# Altium PCB PCB1.PcbDoc (part 2 of 2)
Units mm, origin at the board's own origin, x right, y up, seen from the top; angles counter-clockwise.
Board outline 24 x 26.9 mm, 6 copper layers (Top Layer, Int1 (GND), Int2 (PWR), Int3 (Sign), Int4 (GND), Bottom Layer), stack 1.538 mm thick; 87 components, 95 nets, 449 pads, 224 vias.
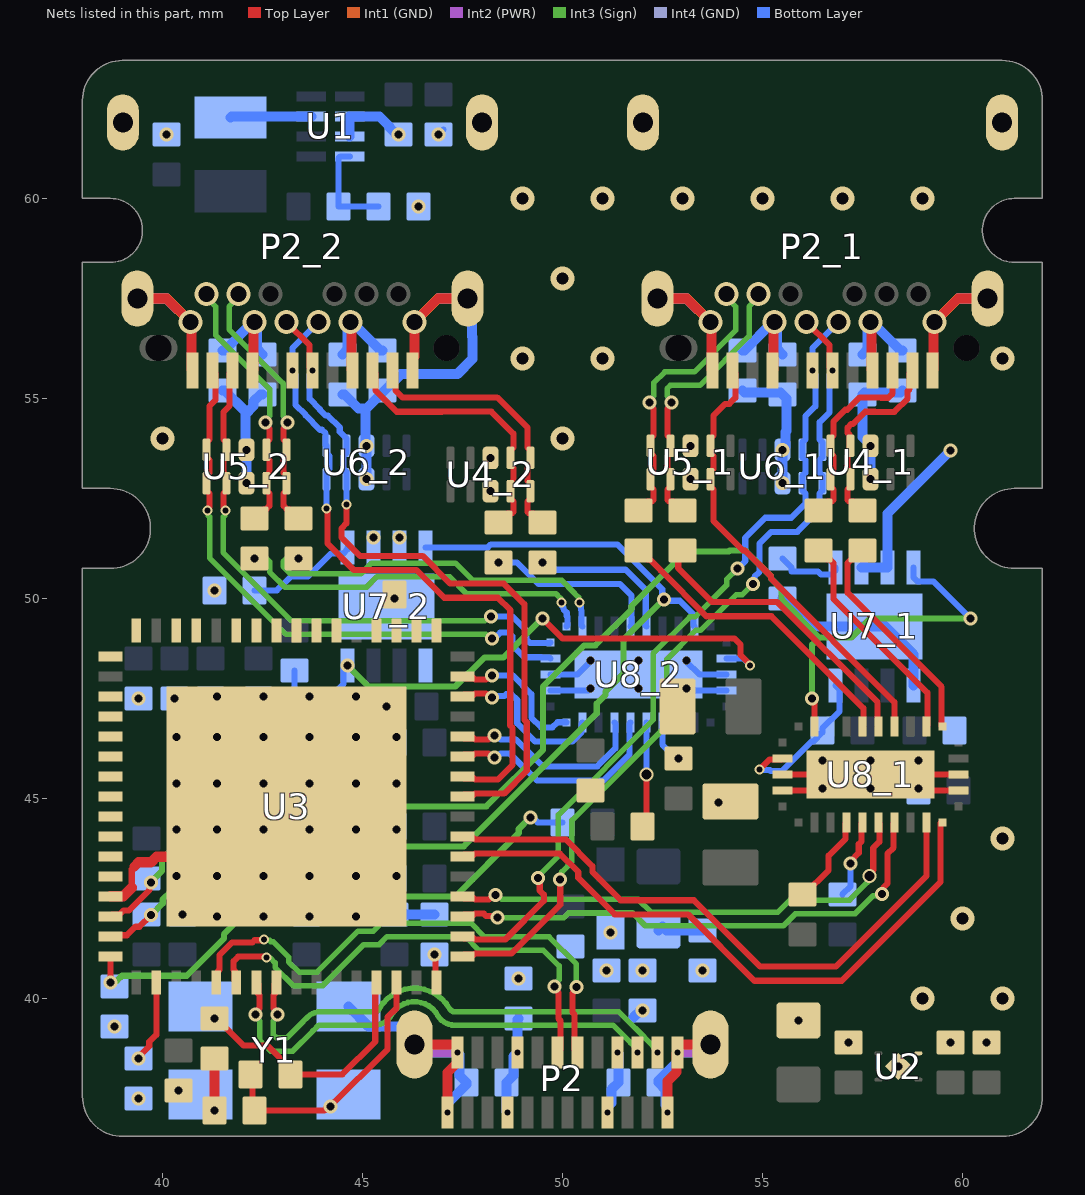
[diagram p6: the nets of this part, all layers, seen from the top]

## Via types
v1: diameter 0.35, hole 0.2, Top Layer to Bottom Layer, 129 vias
v2: diameter 0.2, hole 0.2, Top Layer to Bottom Layer, 44 vias
v3: diameter 0.25, hole 0.15, Top Layer to Bottom Layer, 33 vias
v4: diameter 0.6, hole 0.3, Top Layer to Bottom Layer, 16 vias
v5: diameter 0.35, hole 0.25, Top Layer to Bottom Layer, 2 vias

## Nets (pads, with @x,y where several pads share a name; then routed paths per layer and width w, separated by ;. In a path a pad name is that pad's centre, name@x,y a point inside that pad or via, vN(x,y) a via of type N, cw(c..) or ccw(c..) an arc to the next point about the centre after c; other vN are vias at no path point) (continued)
CRX2_1_P: P2_1.A11 U5_1.2 U5_1.9 U8_1.19 | length 11.2
  Top Layer w0.155: U5_1.2@53.7,53.817 53.7,53.635 53.773,53.562 53.773,53.238 53.7,53.165 U5_1.9@53.7,52.983 53.7,52.8 53.773,52.727 53.773,51.938 54.51,51.2 54.563,51.2 55.214,50.549 55.214,50.496 58.3,47.41 U8_1.19@58.3,46.8 ; U5_1.2@53.7,53.9 53.7,54 53.773,54.073 53.773,54.566 54.071,54.865 54.169,54.865 54.323,55.018 54.323,55.627 P2_1.A11@54.25,55.7
CRX2_2_N: P2_2.A10 U5_2.4 U5_2.7 U8_2.15 | length 14.1
  Top Layer w0.155: v3(41.575,52.2) 41.575,52.226 41.527,52.273 41.527,52.627 41.6,52.7 U5_2.7@41.6,52.883 41.6,53.065 41.527,53.138 41.527,53.462 41.6,53.535 U5_2.4@41.6,53.717 41.6,53.9 41.527,53.973 41.527,54.664 41.677,54.814 41.677,55.627 P2_2.A10@41.75,55.7
  Int3 (Sign) w0.138: v3(41.575,52.2) 41.554,52.179 41.554,52.071 41.519,52.037 41.519,51.153 43.231,49.441 48.056,49.441 48.162,49.547 v1(48.219,49.547)
  Bottom Layer w0.155: v1(48.219,49.547) 48.754,49.547 49.1,49.202 49.1,48.979 49.196,48.883 49.683,48.883 U8_2.15@49.7,48.9
CRX2_2_P: P2_2.A11 U5_2.5 U5_2.6 U8_2.14 | length 14.8
  Top Layer w0.155: v3(41.125,52.2) 41.125,52.226 41.173,52.273 41.173,52.627 41.1,52.7 U5_2.6@41.1,52.883 41.1,53.065 41.173,53.138 41.173,53.462 41.1,53.535 U5_2.5@41.1,53.717 41.1,53.9 41.173,53.973 41.173,54.811 41.323,54.961 41.323,55.627 P2_2.A11@41.25,55.7
  Int3 (Sign) w0.138: v3(41.125,52.2) 41.146,52.179 41.146,52.071 41.181,52.037 41.181,51.013 43.091,49.103 48.078,49.103 48.183,48.998 v1(48.241,48.998)
  Bottom Layer w0.155: v1(48.241,48.998) 48.294,48.998 48.441,49.145 48.654,49.145 48.745,49.055 48.745,48.832 49.049,48.528 49.476,48.528 49.482,48.523 49.677,48.523 U8_2.14@49.7,48.5
CTX1_1_N: C36_1.2 P2_1.A3 U4_1.5 U4_1.6 | length 4.9
  Top Layer w0.155: C36_1.2@56.4,52.2 56.623,52.423 56.727,52.423 56.773,52.468 56.773,52.727 56.7,52.8 U4_1.6@56.7,52.983 56.7,53.165 56.773,53.238 56.773,53.562 56.7,53.635 56.7,54 56.773,54.073 56.773,54.42 57.071,54.718 57.12,54.718 57.425,55.023 57.961,55.023 57.966,55.018 58.147,55.018 58.253,55.124 58.253,55.697 P2_1.A3@58.25,55.7
CTX1_1_P: C35_1.2 P2_1.A2 U4_1.4 U4_1.7 | length 5
  Top Layer w0.155: C35_1.2@57.5,52.2 57.277,52.423 57.173,52.423 57.127,52.468 57.127,52.727 57.2,52.8 U4_1.7@57.2,52.983 57.2,53.165 57.127,53.238 57.127,53.562 57.2,53.635 57.177,53.658 57.177,54.095 57.127,54.145 57.127,54.273 57.218,54.363 57.267,54.363 57.572,54.668 57.814,54.668 57.819,54.663 58.294,54.663 58.627,54.997 58.627,55.187 58.677,55.237 58.677,55.627 P2_1.A2@58.75,55.7
CTX1_2_N: C36_2.2 P2_2.A3 U4_2.2 U4_2.9 | length 7
  Top Layer w0.155: P2_2.A3@45.25,55.7 45.323,55.627 45.323,55.204 45.859,54.668 46.99,54.668 46.995,54.673 48.219,54.673 48.773,54.12 48.773,53.773 48.7,53.7 U4_2.2@48.7,53.518 48.7,53.335 48.773,53.262 48.773,52.938 48.7,52.865 U4_2.9@48.7,52.683 48.7,52.5 48.773,52.427 48.773,52.168 48.727,52.123 48.623,52.123 C36_2.2@48.4,51.9
CTX1_2_P: C35_2.2 P2_2.A2 U4_2.1 U4_2.10 | length 6.9
  Top Layer w0.155: P2_2.A2@45.75,55.7 45.823,55.627 45.823,55.206 46.006,55.023 46.844,55.023 46.848,55.027 48.366,55.027 49.127,54.266 49.127,53.773 49.2,53.7 U4_2.1@49.2,53.518 49.2,53.335 49.127,53.262 49.127,52.938 49.2,52.865 U4_2.10@49.2,52.683 49.2,52.5 49.127,52.427 49.127,52.168 49.173,52.123 49.277,52.123 C35_2.2@49.5,51.9
CTX1_N: P2.A3 U3.55 | length 12.1
  Top Layer w0.155: v1(42.325,39.6) 42.325,39.653 42.423,39.751 42.423,40.087 42.392,40.117 42.392,40.357 U3.55@42.35,40.4
  Int3 (Sign) w0.138: v1(42.325,39.6) 42.325,39.543 42.431,39.437 42.431,38.959 42.71,38.68 43.252,38.68 43.763,39.192 43.862,39.291 cw(c43.96,39.193) 43.96,39.331 45.302,39.331 ccw(c45.3,39.807) 45.715,39.575 cw(c46.3,39.25) 46.886,39.573 ccw(c47.3,39.807) 47.297,39.331 51.263,39.331 51.695,38.899 51.705,38.899 51.819,38.785 51.819,38.736 51.875,38.68 v3(51.875,38.65)
CTX1_P: P2.A2 U3.56 | length 12.2
  Top Layer w0.155: U3.56@42.85,40.4 42.807,40.357 42.807,40.117 42.777,40.087 42.777,39.751 42.875,39.653 v1(42.875,39.6)
  Int3 (Sign) w0.138: v1(42.875,39.6) 42.875,39.543 42.769,39.437 42.769,39.099 42.85,39.018 43.112,39.018 43.524,39.43 ; 43.525,39.431 43.624,39.53 cw(c43.96,39.193) 43.96,39.669 45.301,39.669 ccw(c45.3,39.807) 45.42,39.739 cw(c46.3,39.25) 47.18,39.738 ccw(c47.3,39.807) 47.299,39.669 51.403,39.669 51.835,39.237 51.845,39.237 52.269,38.813 52.269,38.786 52.375,38.68 v3(52.375,38.65)
CTX2_1_N: C38_1.2 P2_1.B3 U5_1.4 U5_1.7 | length 7.2
  Top Layer w0.155: v1(52.725,54.9) 52.725,54.847 52.627,54.749 52.627,54.073 52.7,54 U5_1.4@52.7,53.817 52.7,53.635 52.627,53.562 52.627,53.238 52.7,53.165 U5_1.7@52.7,52.983 52.7,52.8 52.627,52.727 52.627,52.468 52.673,52.423 52.777,52.423 C38_1.2@53,52.2
  Int3 (Sign) w0.138: v1(52.725,54.9) 52.725,54.957 52.619,55.063 52.619,55.247 52.7,55.328 53.436,55.328 54.669,56.561 54.669,57.298 54.9,57.529 P2_1.B3@54.9,57.61
CTX2_1_P: C37_1.2 P2_1.B2 U5_1.5 U5_1.6 | length 7
  Top Layer w0.155: C37_1.2@51.9,52.2 52.123,52.423 52.227,52.423 52.273,52.468 52.273,52.727 52.2,52.8 U5_1.6@52.2,52.983 52.2,53.165 52.273,53.238 52.273,53.562 U5_1.5@52.2,53.635 ; v1(52.175,54.9) 52.175,54.847 52.273,54.749 52.273,54.073 52.2,54 U5_1.5@52.2,53.817
  Int3 (Sign) w0.138: v1(52.175,54.9) 52.175,54.957 52.281,55.063 52.281,55.387 52.56,55.666 53.296,55.666 54.331,56.701 54.331,57.298 54.1,57.529 P2_1.B2@54.1,57.61
CTX2_2_N: C38_2.2 P2_2.B3 U5_2.1 U5_2.10 | length 6.7
  Top Layer w0.155: v1(43.125,54.4) 43.125,54.347 43.027,54.249 43.027,53.973 43.1,53.9 U5_2.1@43.1,53.717 43.1,53.535 43.027,53.462 43.027,53.138 43.1,53.065 U5_2.10@43.1,52.883 43.1,52.7 43.027,52.627 43.027,52.313 43.118,52.223 43.177,52.223 C38_2.2@43.4,52
  Int3 (Sign) w0.138: P2_2.B3@41.9,57.61 41.9,57.529 41.669,57.298 41.669,56.724 43.019,55.374 43.019,54.563 43.125,54.457 v1(43.125,54.4)
CTX2_2_P: C37_2.2 P2_2.B2 U5_2.2 U5_2.9 | length 6.7
  Top Layer w0.155: C37_2.2@42.3,52 42.523,52.223 42.582,52.223 42.673,52.313 42.673,52.627 42.6,52.7 U5_2.9@42.6,52.883 42.6,53.065 42.673,53.138 42.673,53.462 42.6,53.535 U5_2.2@42.6,53.717 42.6,53.9 42.673,53.973 42.673,54.249 42.575,54.347 v1(42.575,54.4)
  Int3 (Sign) w0.138: P2_2.B2@41.1,57.61 41.1,57.529 41.331,57.298 41.331,56.584 42.681,55.234 42.681,54.563 42.575,54.457 v1(42.575,54.4)
D_1_N: P2_1.A7 P2_1.B7 U3.2 U6_1.4 U6_1.7 | length 20.7
  Top Layer w0.155: U3.2@47.5,41.55 47.543,41.507 47.783,41.507 47.813,41.477 48.576,41.477 49.536,42.438 49.536,42.593 49.431,42.698 49.431,42.968 v1(49.393,43.006)
  Int3 (Sign) w0.138: v1(49.393,43.006) 49.393,43.054 49.898,43.558 49.898,44.591 52.269,46.962 52.269,48.618 53.188,49.537 53.31,49.537 54.103,50.33 54.103,50.475 54.37,50.742 v1(54.37,50.748)
  Bottom Layer w0.155: v1(54.37,50.748) 54.38,50.748 54.568,50.936 54.568,51.515 55.07,52.017 55.721,52.017 56.073,52.368 56.073,52.627 56,52.7 U6_1.7@56,52.883 56,53.065 56.073,53.138 56.073,53.462 56,53.535 U6_1.4@56,53.717 56,53.9 56.073,53.973 56.073,54.553 56.323,54.803 56.323,55.602 56.25,55.674 v3(56.25,55.7) 56.25,56.26 P2_1.B7@56.9,56.91
D_1_P: P2_1.A6 P2_1.B6 U3.1 U6_1.5 U6_1.6 | length 21.3
  Top Layer w0.155: U3.1@47.5,41.05 47.543,41.093 47.783,41.093 47.813,41.123 48.723,41.123 49.943,42.343 v1(49.943,42.975) ; P2_1.B6@56.1,56.91 56.677,56.333 56.677,55.773 v3(56.75,55.7)
  Int3 (Sign) w0.138: v1(49.943,42.975) 49.983,43.016 49.983,43.166 50.236,43.418 50.236,44.451 52.607,46.822 52.607,48.479 53.328,49.2 53.45,49.2 54.342,50.092 54.492,50.092 v1(54.762,50.362)
  Bottom Layer w0.155: v1(54.762,50.362) 54.799,50.399 54.799,50.537 54.923,50.661 54.923,51.368 55.217,51.662 55.868,51.662 56.427,52.221 56.427,52.627 56.5,52.7 U6_1.6@56.5,52.883 56.5,53.065 56.427,53.138 56.427,53.462 56.5,53.535 U6_1.5@56.5,53.717 56.5,53.9 56.427,53.973 56.427,54.406 56.677,54.656 56.677,55.602 56.75,55.674 v3(56.75,55.7)
D_2_N: P2_2.A7 P2_2.B7 U3.10 U6_2.1 U6_2.10 | length 16.8
  Top Layer w0.155: v3(44.106,52.25) 44.123,52.233 44.123,51.376 44.788,50.71 46.354,50.71 47.047,50.018 48.388,50.018 48.693,49.713 48.693,46.822 48.752,46.762 48.752,45.838 48.392,45.477 47.813,45.477 47.783,45.507 47.543,45.507 U3.10@47.5,45.55
  Bottom Layer w0.155: P2_2.B7@43.9,56.91 43.25,56.26 v3(43.25,55.7) 43.25,55.674 43.323,55.602 43.323,54.842 43.577,54.587 43.577,54.576 43.935,54.218 43.987,54.218 44.077,54.127 44.077,53.84 U6_2.1@44.1,53.817 44.1,53.635 44.173,53.562 44.173,53.238 44.1,53.165 U6_2.10@44.1,52.983 44.103,52.979 44.103,52.253 v3(44.106,52.25)
D_2_P: P2_2.A6 P2_2.B6 U3.9 U6_2.2 U6_2.9 | length 17.5
  Top Layer w0.155: P2_2.B6@43.1,56.91 43.677,56.333 43.677,55.773 v3(43.75,55.7) ; v3(44.6,52.347) 44.6,51.875 44.477,51.752 44.477,51.523 44.935,51.065 46.501,51.065 47.193,50.373 48.535,50.373 49.048,49.86 49.048,46.969 49.107,46.909 49.107,45.691 48.539,45.123 47.813,45.123 47.783,45.093 47.543,45.093 U3.9@47.5,45.05
  Bottom Layer w0.155: v3(43.75,55.7) 43.75,55.674 43.677,55.602 43.677,54.989 43.932,54.734 43.932,54.723 44.082,54.573 44.134,54.573 44.432,54.274 44.432,54.168 44.6,54 U6_2.2@44.6,53.817 44.6,53.635 44.527,53.562 44.527,53.238 44.6,53.165 v3(44.6,52.347)
D_N: P2.A7 U3.54 | length 12.2
  Top Layer w0.155: U3.54@41.85,40.4 41.807,40.443 41.807,40.683 41.777,40.713 41.777,40.932 41.892,41.047 42.582,41.047 v3(42.6,41.029) ; v1(49.8,40.302) 49.8,40.249 49.898,40.152 49.898,39.499 49.948,39.449 49.948,38.723 P2.A7@49.875,38.65
  Int3 (Sign) w0.138: v3(42.6,41.029) 42.621,41.007 42.703,41.007 42.818,40.892 42.818,40.776 43.276,40.318 44.005,40.318 45.03,41.343 45.415,41.343 45.616,41.544 47.575,41.544 47.915,41.204 49.526,41.204 49.915,40.815 49.915,40.474 49.8,40.359 v1(49.8,40.302)
D_P: P2.A6 U3.53 | length 13.4
  Top Layer w0.155: U3.53@41.35,40.4 41.392,40.443 41.392,40.683 41.422,40.713 41.422,41.079 41.745,41.402 42.247,41.402 42.302,41.457 42.523,41.457 v3@42.536,41.47 ; v1(50.35,40.282) 50.35,40.229 50.252,40.131 50.252,39.646 50.302,39.596 50.302,38.723 P2.A6@50.375,38.65
  Int3 (Sign) w0.138: v3(42.541,41.475) 42.562,41.454 42.677,41.454 42.708,41.423 42.765,41.423 43.156,41.032 43.156,40.916 43.416,40.656 43.865,40.656 44.89,41.681 45.275,41.681 45.476,41.882 47.715,41.882 48.055,41.542 49.666,41.542 50.35,40.858 v1(50.35,40.282)
FB_1V1: R3.1 R4.2 U1.4 | length 2.5
  Bottom Layer w0.155: U1.4@44.68,61.05 44.45,61.05 44.4,61 R3.1@44.4,59.8 R4.2@45.4,59.8
GND: C1.1 C2.1 C4.1 C5.1 C6.1 C7.1 C8.1 C9.1 C10.1 C13.1 C14.1 C15.1 C16.1 C17.1 C18.1 C19.1 C20.1 C21.1 C22.1 C23.1 C24.1 C25.1 C26.1 C27.1 C28.1 C29.1 C30.1 C31_1.1 C31_2.1 C32_1.1 C32_2.1 C33_1.1 C33_2.1 C34_1.1 C34_2.1 C39_1.1 C39_2.1 C40_1.1 C40_2.1 C41_1.1 C41_2.1 P2.0 P2.A1 P2.A12 P2.B1 P2.B12 P2_1.0 P2_1.A1 P2_1.A12 P2_1.B1 P2_1.B12 P2_2.0 P2_2.A1 P2_2.A12 P2_2.B1 P2_2.B12 R1.1 R2.1 R4.1 R6.1 R8.1 R10_1.1 R10_2.1 U1.2 U1.3 U2.2 U2.5 U3.40 U3.45 U3.65 U4_1.3 U4_1.8 U4_2.3 U4_2.8 U5_1.3 U5_1.8 U5_2.3 U5_2.8 U6_1.3 U6_1.8 U6_2.3 U6_2.8 U7_1.1 U7_1.9 U7_2.1 U7_2.9 U8_1.12 U8_1.13 U8_1.28 U8_1.29 U8_1.31 U8_2.12 U8_2.13 U8_2.28 U8_2.29 U8_2.31 Y1.2 Y1.4 | length 94.7
  Top Layer w0.155: 39.231,42.769 39.231,43.231 39.3,43.3 ; v1(46.9,61.6) v1@46.937,61.637 ; P2_2.0@47.727,61.637 P2_2.0@47.99,61.9 ; U8_1.29@55.5,45.2 56.45,45.2 v2(56.5,45.25) ; U8_1.28@55.5,45.6 56.177,45.6 U8_1.31@56.5,45.923 ; v2(58.9,45.25) 58.95,45.2 U8_1.12@59.9,45.2 ; U8_1.31@58.9,45.923 59.223,45.6 U8_1.13@59.9,45.6
  Top Layer w0.254: U3.45@38.7,42.55 38.707,42.557 39.019,42.557 39.231,42.769 ; 39.3,43.3 39.406,43.406 39.716,43.406 39.851,43.541 41.841,43.541 v2(42.52,44.22) ; P2_2.0@39.37,57.5 40.11,57.5 P2_2.B1@40.7,56.91 40.727,56.883 40.727,55.723 P2_2.A12@40.75,55.7 ; v1(41.3,37.2) C28.1@41.3,38.5 ; P2_2.A1@46.25,55.7 46.25,56 46.3,56.05 P2_2.B12@46.3,56.91 46.89,57.5 P2_2.0@47.63,57.5 ; P2.0@46.3,38.85 47.352,38.85 47.375,38.827 v3(47.375,38.65) 47.375,38.4 47.125,38.15 v3(47.125,37.15) ; P2_1.0@52.37,57.5 53.11,57.5 P2_1.B1@53.7,56.91 53.727,56.883 53.727,55.723 P2_1.A12@53.75,55.7 ; v3(52.625,37.15) 52.625,37.931 52.852,38.158 52.852,38.627 v3(52.875,38.65) 52.875,38.827 52.898,38.85 P2.0@53.7,38.85 ; P2_1.A1@59.25,55.7 59.273,55.723 59.273,56.883 P2_1.B12@59.3,56.91 59.89,57.5 P2_1.0@60.63,57.5
  Int2 (PWR) w0.155: v1(46.9,61.6) v1@46.937,61.637 ; P2_2.0@47.727,61.637 P2_2.0@47.99,61.9
  Int2 (PWR) w0.254: P2_2.0@39.37,57.5 40.11,57.5 P2_2.B1@40.7,56.91 ; P2.0@46.3,38.85 46.5,38.65 v3(47.375,38.65) ; P2_2.B12@46.3,56.91 46.89,57.5 P2_2.0@47.63,57.5 ; P2_1.0@52.37,57.5 53.11,57.5 P2_1.B1@53.7,56.91 ; v3(52.875,38.65) 53.5,38.65 P2.0@53.7,38.85 ; P2_1.B12@59.3,56.91 59.89,57.5 P2_1.0@60.63,57.5
  Int3 (Sign) w0.155: v1(46.9,61.6) v1@46.937,61.637 ; P2_2.0@47.727,61.637 P2_2.0@47.99,61.9
  Int1 (GND) w0.155: v1(46.9,61.6) v1@46.937,61.637 ; P2_2.0@47.727,61.637 P2_2.0@47.99,61.9
  Int1 (GND) w0.254: P2_2.0@39.37,57.5 40.11,57.5 P2_2.B1@40.7,56.91 ; P2_2.B12@46.3,56.91 46.89,57.5 P2_2.0@47.63,57.5 ; P2_1.0@52.37,57.5 53.11,57.5 P2_1.B1@53.7,56.91 ; P2_1.B12@59.3,56.91 59.89,57.5 P2_1.0@60.63,57.5
  Int4 (GND) w0.155: v1(46.9,61.6) v1@46.937,61.637 ; P2_2.0@47.727,61.637 P2_2.0@47.99,61.9
  Int4 (GND) w0.254: P2_2.0@39.37,57.5 40.11,57.5 P2_2.B1@40.7,56.91 ; P2_2.B12@46.3,56.91 46.89,57.5 P2_2.0@47.63,57.5 ; P2_1.0@52.37,57.5 53.11,57.5 P2_1.B1@53.7,56.91 ; P2_1.B12@59.3,56.91 59.89,57.5 P2_1.0@60.63,57.5
  Bottom Layer w0.155: v1(46.9,61.6) C9.1@47.027,61.727 ; P2_2.0@47.818,61.727 P2_2.0@47.99,61.9 ; U8_2.12@49.7,47.7 50.65,47.7 v2(50.7,47.75) ; U8_2.13@49.7,48.1 50.377,48.1 U8_2.31@50.7,48.423 ; v2(53.1,47.75) 53.15,47.7 U8_2.29@54.1,47.7 ; U8_2.31@53.1,48.423 53.423,48.1 U8_2.28@54.1,48.1
  Bottom Layer w0.254: P2_2.0@39.37,57.5 40.11,57.5 P2_2.B1@40.7,56.91 ; C31_2.1@41.5,55.2 41.55,55.2 42.073,54.677 42.073,54.608 ; v1(42.1,52.883) v1(42.1,53.717) 42.1,53.743 42.073,53.77 42.073,54.608 ; C32_2.1@42.5,55.1 42.45,55.1 42.277,54.927 42.277,54.812 42.073,54.608 ; C33_2.1@44.5,55.1 44.55,55.1 44.9,54.75 45.1,54.75 ; Y1.4@44.65,39.8 45.148,39.302 46.002,39.302 46.3,39.004 P2.0@46.3,38.85 46.5,38.65 v3(47.375,38.65) 47.427,38.598 47.427,38.073 C5.1@47.6,37.9 47.6,37.85 47.125,37.375 v3(47.125,37.15) ; U1.3@44.68,61.55 U1.2@44.68,62.05 45.427,62.05 45.677,61.8 45.677,61.773 45.85,61.6 v1(45.9,61.6) ; v2(44.84,42.05) 44.89,42.1 C26.1@45.8,42.1 R6.1@46.8,42.1 ; v1(45.1,52.983) v1(45.1,53.817) 45.079,53.839 45.079,54.729 45.1,54.75 ; P2_2.B12@46.3,56.91 46.89,57.5 P2_2.0@47.63,57.5 47.734,57.396 47.734,56.548 47.752,56.53 47.752,55.99 47.37,55.608 45.958,55.608 45.45,55.1 45.1,54.75 ; P2_1.0@52.37,57.5 53.11,57.5 P2_1.B1@53.7,56.91 ; v3(52.625,37.15) 52.625,37.289 52.573,37.341 52.573,37.727 C6.1@52.4,37.9 52.4,37.95 52.875,38.425 v3(52.875,38.65) 53.5,38.65 P2.0@53.7,38.85 ; C31_1.1@54.5,55.2 54.55,55.15 55.45,55.15 C32_1.1@55.5,55.1 55.602,54.998 55.602,54.192 55.573,54.163 55.573,53.79 v1(55.5,53.717) v1(55.5,52.883) ; R10_1.1@55.5,50 55.55,50 56.039,49.511 56.039,49.48 56.219,49.3 U7_1.9@57.8,49.3 58.077,49.3 58.775,48.602 U7_1.1@58.775,47.825 ; v1(57.7,52.983) v1(57.7,53.817) 57.7,53.843 57.5,54.043 C33_1.1@57.5,55.1 57.55,55.15 58.45,55.15 C34_1.1@58.5,55.2 ; P2_1.B12@59.3,56.91 59.89,57.5 P2_1.0@60.63,57.5
  other v1: 39.4,37.5 40.4,37.7 58.4,38.3 57.15,38.9 59.7,38.9 60.6,38.9 38.8,39.3 55.9,39.45 48.9,40.5 51.1,40.7 52,40.7 53.5,40.7 40.5,42.1 53.9,44.9 45.6,47.3 39.4,47.5 40.3,47.5 45.8,50 41.3,50.2 48.2,52.683 53.2,52.983 48.2,53.518 53.2,53.817 46.4,59.8 40.1,61.6
  other v2: 41.36,42.05 42.52,42.05 43.68,42.05 40.35,43.06 41.36,43.06 42.52,43.06 43.68,43.06 44.84,43.06 45.85,43.06 40.35,44.22 41.36,44.22 43.68,44.22 44.84,44.22 45.85,44.22 57.7,45.25 40.35,45.38 41.36,45.38 42.52,45.38 43.68,45.38 44.84,45.38 45.85,45.38 56.5,45.95 57.7,45.95 58.9,45.95 40.35,46.54 41.36,46.54 42.52,46.54 43.68,46.54 44.84,46.54 45.85,46.54 41.36,47.55 42.52,47.55 43.68,47.55 44.84,47.55 51.9,47.75 50.7,48.45 51.9,48.45 53.1,48.45
  other v4: 59,40 61,40 60,42 61,44 40,54 50,54 49,56 51,56 61,56 50,58 49,60 51,60 53,60 55,60 57,60 59,60
GRST_N: C30.2 U3.50 | length 2.1
  Top Layer w0.155: v1(39.4,38.5) 39.4,38.536 39.67,38.806 39.67,38.916 39.849,39.095 U3.50@39.849,40.4
ID_1: R9_1.1 U7_1.4 U8_1.27 | length 4
  Top Layer w0.155: v3(54.926,45.726) 54.929,45.726 55.18,45.978 55.477,45.978 U8_1.27@55.5,46
  Bottom Layer w0.155: v3(54.926,45.726) 54.944,45.708 55.187,45.708 55.206,45.689 55.489,45.689 56.227,46.427 56.278,46.427 56.5,46.65 R9_1.1@56.5,46.7 ; R9_1.1@56.5,46.75 56.928,47.178 56.928,47.225 56.923,47.23 56.923,47.727 U7_1.4@56.825,47.825
ID_2: R9_2.1 U7_2.4 U8_2.27 | length 15.2
  Top Layer w0.155: v1(49.5,49.5) 50,49 54.3,49 54.448,48.852 54.448,48.589 54.693,48.344 v3(54.693,48.328)
  Int3 (Sign) w0.155: v1(44.625,48.325) 45.15,47.8 47.326,47.8 48.053,48.528 48.528,48.528 v1(49.5,49.5)
  Bottom Layer w0.155: R9_2.1@43.3,48.2 43.3,47.396 43.524,47.172 43.836,47.172 44.528,47.864 44.528,48.227 v1(44.625,48.325) ; U8_2.27@54.1,48.5 54.521,48.5 v3(54.693,48.328)
ILIM_1: R10_1.2 U7_1.5 | length 1.7
  Bottom Layer w0.155: R10_1.2@55.5,51 55.722,50.778 55.722,50.678 56.383,50.678 56.46,50.6 56.728,50.6 56.825,50.697 U7_1.5@56.825,50.775
ILIM_2: R10_2.2 U7_2.5 | length 2.8
  Bottom Layer w0.155: R10_2.2@42.3,50.2 42.86,50.2 43.208,50.548 43.637,50.548 44.217,51.127 44.528,51.127 44.625,51.225 U7_2.5@44.625,51.275
NetC3_1: C3.1 R1.2 | length 1.2
  Bottom Layer w0.254: C3.1@52.4,41.7 52.5,41.8 52.6,41.7 R1.2@53.5,41.7
NetU3_17: U3.17
NetU3_18: U3.18
NetU3_19: U3.19
NetU3_20: U3.20
NetU3_22: U3.22
NetU3_23: U3.23
NetU3_24: U3.24
NetU3_25: U3.25
NetU3_26: U3.26
NetU3_27: U3.27
NetU3_29: U3.29
NetU3_30: U3.30
NetU3_32: U3.32
NetU3_33: U3.33
NetU3_35: U3.35
NetU3_36: U3.36
NetU3_37: U3.37
NetU3_38: U3.38
NetU3_39: U3.39
NetU3_41: U3.41
NetU3_42: U3.42
NetU3_43: U3.43
NetU3_44: U3.44
OVERCURz_1: R13_1.1 U3.46 U7_1.8 U8_1.24 | length 32.3
  Top Layer w0.155: U3.46@38.7,42.05 38.743,42.092 38.923,42.092 39.033,42.202 39.166,42.202 39.677,42.714 39.677,42.867 v1(39.714,42.904) ; v1(56.239,47.5) 56.239,47.447 56.3,47.386 U8_1.24@56.3,46.8
  Int3 (Sign) w0.155: v1(39.714,42.904) 39.714,42.914 39.99,43.19 39.99,43.49 40.342,43.843 40.506,43.843 40.728,44.064 40.728,44.228 41.3,44.8 48.1,44.8 49.516,46.216 49.516,47.799 50.544,48.827 50.822,48.827 51.728,49.733 51.728,49.812 53.092,51.177 54.159,51.177 54.182,51.2 54.563,51.2 55.214,50.549 55.214,50.496 55.476,50.235 55.476,49.964 56.418,49.022 ; v1(56.239,47.5) 56.239,48.843 56.418,49.022 ; v1(60.2,49.5) 57.7,49.5 57.222,49.022 56.418,49.022
  Bottom Layer w0.155: U7_1.8@58.775,50.775 58.775,50.525 58.873,50.428 59.272,50.428 v1(60.2,49.5)
OVERCURz_2: R13_2.1 U3.47 U7_2.8 U8_2.24 | length 26.1
  Top Layer w0.155: U3.47@38.7,41.55 38.729,41.579 39.11,41.579 39.323,41.791 39.423,41.791 v1(39.716,42.084)
  Int3 (Sign) w0.155: v1(39.716,42.084) 40.009,42.377 40.009,42.477 40.214,42.683 40.506,42.683 40.728,42.904 40.728,43.196 41.332,43.8 47.531,43.8 50.856,47.125 50.856,47.373 51.078,47.594 51.078,47.677 51.523,48.122 51.523,48.967 v1(52.534,49.979)
  Bottom Layer w0.155: U7_2.8@46.575,51.275 48.135,51.275 48.213,51.353 51.374,51.353 52.497,50.23 52.497,50.016 v1(52.534,49.979) 52.572,49.942 52.93,49.942 53.278,49.594 53.278,49.322 U8_2.24@53.3,49.3
PORT_1: R11_1.1 U8_1.4 | length 2.3
  Top Layer w0.155: R11_1.1@56,42.6 56.05,42.6 56.652,43.202 56.652,43.567 57.077,43.992 57.077,44.377 U8_1.4@57.1,44.4
PORT_2: R11_2.1 U8_2.4 | length 1.1
  Bottom Layer w0.155: U8_2.4@52.5,46.9 52.5,46.347 52.847,46 v1(52.9,46)
SSRX_1_N: U3.6 U8_1.10 | length 15.9
  Top Layer w0.155: U3.6@47.5,43.55 47.543,43.593 47.783,43.593 47.813,43.623 49.935,43.623 50.393,43.164 50.393,43.016 51.306,42.102 53.138,42.102 54.798,40.443 56.984,40.443 59.455,42.913 59.455,44.382 59.482,44.382 U8_1.10@59.5,44.4
SSRX_1_P: U3.7 U8_1.9 | length 15.3
  Top Layer w0.155: U3.7@47.5,44.05 47.543,44.007 47.783,44.007 47.813,43.977 50.081,43.977 50.748,43.311 50.748,43.163 51.453,42.457 53.285,42.457 54.945,40.798 56.837,40.798 59.1,43.06 U8_1.9@59.1,44.4
SSRX_2_N: U3.15 U8_2.10 | length 3.6
  Top Layer w0.155: U3.15@47.5,48.05 47.543,48.007 47.783,48.007 47.813,47.977 48.09,47.977 48.188,48.075 v1(48.241,48.075)
  Bottom Layer w0.155: v1(48.241,48.075) 48.756,48.075 49.223,47.609 49.223,47.023 49.468,46.777 49.749,46.777 49.877,46.905 50.095,46.905 U8_2.10@50.1,46.9
SSRX_2_P: U3.14 U8_2.9 | length 4.3
  Top Layer w0.155: U3.14@47.5,47.55 47.543,47.593 47.783,47.593 47.813,47.623 48.09,47.623 48.188,47.525 v1(48.241,47.525)
  Bottom Layer w0.155: v1(48.241,47.525) 48.278,47.562 48.555,47.562 48.597,47.605 48.725,47.605 48.868,47.462 48.868,46.876 49.321,46.423 50.244,46.423 50.477,46.656 50.477,46.877 U8_2.9@50.5,46.9
SSTX1_1_N: C36_1.1 U8_1.17 | length 5.6
  Top Layer w0.155: C36_1.1@56.4,51.2 56.623,50.977 56.682,50.977 56.773,50.887 56.773,49.993 59.123,47.643 59.123,46.823 U8_1.17@59.1,46.8
SSTX1_1_P: C35_1.1 U8_1.16 | length 5.6
  Top Layer w0.155: C35_1.1@57.5,51.2 57.277,50.977 57.218,50.977 57.127,50.887 57.127,50.14 59.477,47.79 59.477,46.818 59.495,46.8 U8_1.16@59.5,46.8
SSTX1_2_N: C36_2.1 U8_2.20 | length 4.5
  Bottom Layer w0.155: v1(48.4,50.9) 48.86,50.9 49.397,50.363 51.431,50.363 51.727,50.067 51.727,49.733 51.723,49.729 51.723,49.323 U8_2.20@51.7,49.3
SSTX1_2_P: C35_2.1 U8_2.21 | length 3.8
  Bottom Layer w0.155: v1(49.5,50.9) 49.506,50.9 49.688,50.718 51.578,50.718 52.082,50.214 52.082,49.318 U8_2.21@52.1,49.3
SSTX2_1_N: C38_1.1 U8_1.20 | length 7.5
  Top Layer w0.155: C38_1.1@53,51.2 52.896,51.096 52.896,50.759 53.745,49.909 55.37,49.909 57.877,47.402 57.877,46.823 U8_1.20@57.9,46.8
SSTX2_1_P: C37_1.1 U8_1.21 | length 7.7
  Top Layer w0.155: C37_1.1@51.9,51.2 52.123,50.977 52.182,50.977 52.452,50.708 52.452,50.701 53.598,49.555 55.223,49.555 57.523,47.255 57.523,46.823 U8_1.21@57.5,46.8
SSTX2_2_N: C38_2.1 U8_2.17 | length 9.2
  Int3 (Sign) w0.138: v1(43.4,51) 43.1,51 43.019,50.919 43.019,50.805 43.206,50.618 44.962,50.618 45.226,50.882 47.32,50.882 47.746,50.456 49.978,50.456 50.291,50.143 50.291,50.141 50.404,50.029 50.404,49.921 v3(50.425,49.9)
  Bottom Layer w0.155: v3(50.425,49.9) 50.443,49.882 50.443,49.814 50.464,49.794 50.464,49.71 50.477,49.697 50.477,49.323 U8_2.17@50.5,49.3
SSTX2_2_P: C37_2.1 U8_2.16 | length 9.2
  Int3 (Sign) w0.138: v1(42.3,51) 42.6,51 42.681,50.919 42.681,50.665 43.066,50.28 45.102,50.28 45.366,50.544 47.18,50.544 47.606,50.118 49.838,50.118 49.954,50.003 49.954,49.921 v3(49.975,49.9)
  Bottom Layer w0.155: v3(49.975,49.9) 49.993,49.882 49.993,49.807 50.023,49.777 50.023,49.733 50.109,49.647 50.109,49.563 50.123,49.55 50.123,49.327 50.106,49.327 50.1,49.321 U8_2.16@50.1,49.3
SSTX_1_N: U3.3 U8_1.7 | length 13
  Top Layer w0.155: U3.3@47.5,42.05 47.543,42.093 47.783,42.093 47.813,42.123 48.032,42.123 48.097,42.058 48.342,42.058 v1(48.379,42.021) ; v1(57.989,42.611) 58.026,42.648 58.026,42.775 58.124,42.873 58.124,43.618 58.277,43.771 58.277,44.377 U8_1.7@58.3,44.4
  Int3 (Sign) w0.138: v1(48.379,42.021) 50.036,42.021 50.152,42.136 51.751,42.136 52.069,41.818 55.524,41.818 55.824,42.118 57.317,42.118 57.769,42.571 57.948,42.571 v1(57.989,42.611)
SSTX_1_P: U3.4 U8_1.6 | length 12.3
  Top Layer w0.155: U3.4@47.5,42.55 47.543,42.507 47.783,42.507 47.813,42.477 48.165,42.477 48.277,42.589 v1(48.33,42.589) ; v5(57.671,43.06) 57.671,43.113 57.769,43.211 57.769,43.764 57.923,43.918 57.923,44.377 U8_1.6@57.9,44.4
  Int3 (Sign) w0.138: v1(48.33,42.589) 48.368,42.589 48.483,42.474 51.891,42.474 52.209,42.156 55.384,42.156 55.684,42.456 57.177,42.456 57.631,42.91 57.631,43.02 v5(57.671,43.06)
SSTX_2_N: U3.12 U8_2.7 | length 5.1
  Top Layer w0.155: U3.12@47.5,46.55 47.543,46.507 47.783,46.507 47.813,46.477 48.149,46.477 48.247,46.575 v1(48.3,46.575)
  Bottom Layer w0.155: v1(48.3,46.575) 48.353,46.575 48.451,46.477 48.836,46.477 49.513,45.8 50.871,45.8 51.323,46.251 51.323,46.877 U8_2.7@51.3,46.9
SSTX_2_P: U3.11 U8_2.6 | length 5.6
  Top Layer w0.155: U3.11@47.5,46.05 47.543,46.093 47.783,46.093 47.813,46.123 48.149,46.123 48.247,46.025 v1(48.3,46.025)
  Bottom Layer w0.155: v1(48.3,46.025) 48.353,46.025 48.451,46.123 48.689,46.123 49.366,45.445 51.018,45.445 51.677,46.104 51.677,46.877 U8_2.6@51.7,46.9
SW: L1.1 U1.7 | length 2
  Bottom Layer w0.254: L1.1@41.7,62.024 41.726,62.05 U1.7@43.72,62.05
USB_R1: R6.2 U3.64 | length 0.7
  Top Layer w0.155: v1(46.8,41.1) 46.825,41.075 46.825,40.425 U3.64@46.851,40.4
USB_VBUS: R7.1 R8.2 U3.48 | length 13.8
  Top Layer w0.155: v1(38.7,40.4) U3.48@38.7,41.05
  Int3 (Sign) w0.155: v1(38.7,40.4) 38.737,40.437 38.859,40.437 38.988,40.566 40.606,40.566 41.536,41.496 41.536,41.599 42.484,42.547 47.318,42.547 48.907,44.137 48.907,44.237 v1(49.2,44.53)
  Bottom Layer w0.155: v1(49.2,44.53) 49.253,44.53 49.382,44.4 R7.1@50,44.4
VBUS: C1.2 C4.2 C5.2 C6.2 FB1.2 P2.A4 P2.A9 P2.B4 P2.B9 | length 4.4
  Bottom Layer w0.254: v3(48.625,37.15) 48.6,37.175 C5.2@48.6,37.9 48.773,38.073 48.773,38.548 v3(48.875,38.65) 48.875,39.475 C4.2@48.9,39.5 ; v3(51.125,37.15) 51.125,37.289 51.227,37.391 51.227,37.727 C6.2@51.4,37.9 51.4,38.625 v3(51.375,38.65) ; C1.2@51.777,39.527 51.95,39.7 v1(52,39.7)
  other v1: 51.2,41.65
VBUS_1: C31_1.2 C32_1.2 C33_1.2 C34_1.2 P2_1.A4 P2_1.A9 P2_1.B4 P2_1.B9 U7_1.6 U7_1.7 | length 10.7
  Top Layer w0.254: P2_1.A9@55.25,55.7 55.273,55.723 55.273,56.883 P2_1.B4@55.3,56.91 ; P2_1.B9@57.7,56.91 57.727,56.883 57.727,55.723 P2_1.A4@57.75,55.7
  Bottom Layer w0.254: C31_1.2@54.5,56.2 54.55,56.2 55.26,56.91 P2_1.B4@55.3,56.91 55.366,56.844 55.366,56.234 C32_1.2@55.5,56.1 ; U7_1.6@57.475,50.775 U7_1.7@58.125,50.775 58.125,52.125 v1(59.7,53.7) ; C33_1.2@57.5,56.1 57.634,56.234 57.634,56.844 P2_1.B9@57.7,56.91 57.74,56.91 58.45,56.2 C34_1.2@58.5,56.2
VBUS_2: C31_2.2 C32_2.2 C33_2.2 C34_2.2 P2_2.A4 P2_2.A9 P2_2.B4 P2_2.B9 U7_2.6 U7_2.7 | length 6.4
  Top Layer w0.254: P2_2.A9@42.25,55.7 42.273,55.723 42.273,56.883 P2_2.B4@42.3,56.91 ; P2_2.B9@44.7,56.91 44.727,56.883 44.727,55.723 P2_2.A4@44.75,55.7
  Bottom Layer w0.254: C31_2.2@41.5,56.2 41.55,56.2 42.26,56.91 P2_2.B4@42.3,56.91 42.366,56.844 42.366,56.234 C32_2.2@42.5,56.1 ; C33_2.2@44.5,56.1 44.634,56.234 44.634,56.844 P2_2.B9@44.7,56.91 44.74,56.91 45.45,56.2 C34_2.2@45.5,56.2
  other v1: 45.275,51.525 45.925,51.525
VBUS_DET_1: R12_1.1 U8_1.5 | length 2
  Top Layer w0.155: v1(57.204,43.38) 57.204,43.433 57.408,43.637 57.408,43.861 57.477,43.93 57.477,44.377 U8_1.5@57.5,44.4
  Bottom Layer w0.155: R12_1.1@57,42.6 57.204,42.804 v1(57.204,43.38)
VBUS_DET_2: R12_2.1 U8_2.5 | length 2.6
  Top Layer w0.155: R12_2.1@52,44.3 52.1,44.4 v5(52.1,45.6)
  Bottom Layer w0.155: v5(52.1,45.6) U8_2.5@52.1,46.9
XI: C29.2 R5.2 U3.62 Y1.1 | length 6.7
  Top Layer w0.155: R5.2@42.2,38.1 42.25,38.05 42.25,37.25 C29.2@42.3,37.2 44.047,37.2 44.147,37.3 v1(44.2,37.3) 45.622,38.722 45.622,39.531 45.851,39.759 U3.62@45.851,40.4
XO: C28.2 R5.1 U3.61 Y1.3 | length 6.6
  Top Layer w0.155: v1(41.3,39.5) 41.35,39.5 42.025,38.825 42.625,38.825 43.3,38.15 R5.1@43.3,38.1 ; R5.1@43.2,38.1 R5.1@43.3,38.1 ; U3.61@45.351,40.4 45.317,40.367 45.317,38.923 44.494,38.1 R5.1@43.3,38.1
pads on no net: P2.A8 P2.A10 P2.A11 P2.B2 P2.B3 P2.B5 P2.B6 P2.B7 P2.B8 P2_1. P2_1.A8 P2_1.B8 P2_2. P2_2.A8 P2_2.B8 U1.6 U3.49 U3.60 U8_1.3 U8_1.11 U8_1.22 U8_1.23 U8_1.25 U8_1.26 U8_2.3 U8_2.11 U8_2.22 U8_2.23 U8_2.25 U8_2.26

## Polygon pours and split planes (outlines as drawn)
VBUS on Int2 (PWR) "VBUS_L03_P005" (solid, remove dead copper, pour order 5): 49.285,42.4 48.408,41.523 47.377,41.523 46.8,42.1 46.4,41.7 46.4,36.55 55.2,36.55 55.2,39.7 52.5,42.4
VBUS_2 on Int2 (PWR) "VBUS_2_L03_P007" (solid, remove dead copper, pour order 7): 43.1,51.3 43.1,54.8 42.088,55.812 42.088,57.4 47.7,57.4 47.7,52.3 46.7,51.3
+1.1V on Int2 (PWR) "+1.1V_L03_P008" (solid, remove dead copper, pour order 8): 47.801,56.9 41.297,56.9 38.09,60.01 38.003,63.403 45.791,63.403 45.791,61.04 47.516,59.103 49.303,59.103 49.921,58.486 49.885,52.685 46.903,49.703 43.8,49.7 43.603,49.503 43.603,48.203 44.703,47.103 46.829,47.103 47.303,46.629 47.303,42.605 46.201,41.503 44.721,41.503 43.821,40.603 40.876,40.603 39.975,41.504 40.024,49.6 40.922,49.6 42.794,51.3 46.7,51.3 47.75,52.35
+5V on Int2 (PWR) "+5V_L03_P004" (solid, remove dead copper, pour order 4): 46,61.043 47.525,59.3 49.3,59.3 50.1,58.5 50.1,52.7 47,49.6 43.8,49.6 43.7,49.5 43.7,48.3 44.6,47.4 46.526,47.4 47.302,46.624 47.302,42.604 46.8,42.102 46.8,42.1 47.377,41.523 48.408,41.523 49.285,42.4 52.5,42.4 54.1,40.8 55.6,39.3 55.6,36.55 58.2,36.55 58.2,41 57.5,41.7 57.5,44.7 59.6,46.8 62,46.8 62,51.5 61.9,51.4 55.2,51.4 52.1,54.5 52.1,63.4 46,63.4
GND on Int2 (PWR) "GND_L03_P015" (solid, pour order 15): 38.101,60.899 42,57 42,55.8 42.992,54.808 42.992,51.492 41.288,49.788 39.313,49.788 38.101,51
GND on Int2 (PWR) "GND_L03_P014" (solid, remove dead copper, pour order 14): 62,58.1 62,63.45 52.1,63.45 52.1,56.7 59.3,56.7 59.6,56.4 59.6,52.75 62,52.75
VBUS_1 on Int2 (PWR) "VBUS_1_L03_P006" (solid, remove dead copper, pour order 6): 59.143,51.6 62,54.127 62,58.1 59.4,58.1 52.3,58.1 52.3,54.7 55.4,51.6
+3.3V on Int2 (PWR) "+3.3V_L03_P003" (solid, remove dead copper, pour order 3): 57.671,44.571 59.7,46.6 62,46.6 62,36.55 58.4,36.55 58.4,41.119 57.671,41.82
+3.3V on Int2 (PWR) "+3.3V_L03_P009" (solid, remove dead copper, pour order 9): 44.9,41.4 43.9,40.4 41.073,40.4 39.8,41.673 39.8,50.1 39.1,50.8 38,50.8 38,36.55 46.2,36.55 46.2,40.7 45.5,41.4
GND on Int4 (GND) "GND_L05_P001" (solid, remove dead copper, pour order 1): 38,37.55 38,50.75 38.7,50.75 ccw(c38.7,51.75) 38.7,52.75 38,52.75 38,58.1 38.7,58.1 ccw(c38.7,58.9) 38.7,59.7 38,59.7 38,62.45 cw(c39,62.45) 39,63.45 61,63.45 cw(c61,62.45) 62,62.45 62,59.7 61.3,59.7 ccw(c61.3,58.9) 61.3,58.1 62,58.1 62,52.75 61.3,52.75 ccw(c61.3,51.75) 61.3,50.75 62,50.75 62,37.55 cw(c61,37.55) 61,36.55 39,36.55 cw(c39,37.55)
GND on Int1 (GND) "GND_L02_P002" (solid, remove dead copper, pour order 2): 38,37.55 38,50.75 38.7,50.75 ccw(c38.7,51.75) 38.7,52.75 38,52.75 38,58.1 38.7,58.1 ccw(c38.7,58.9) 38.7,59.7 38,59.7 38,62.45 cw(c39,62.45) 39,63.45 61,63.45 cw(c61,62.45) 62,62.45 62,59.7 61.3,59.7 ccw(c61.3,58.9) 61.3,58.1 62,58.1 62,52.75 61.3,52.75 ccw(c61.3,51.75) 61.3,50.75 62,50.75 62,37.55 cw(c61,37.55) 61,36.55 39,36.55 cw(c39,37.55)
GND on Top Layer "GND_L01_P012" (solid, remove dead copper, pour order 12): 38,37.55 38,50.75 38.7,50.75 ccw(c38.7,51.75) 38.7,52.75 38,52.75 38,58.1 38.7,58.1 ccw(c38.7,58.9) 38.7,59.7 38,59.7 38,62.45 cw(c39,62.45) 39,63.45 61,63.45 cw(c61,62.45) 62,62.45 62,59.7 61.3,59.7 ccw(c61.3,58.9) 61.3,58.1 62,58.1 62,52.75 61.3,52.75 ccw(c61.3,51.75) 61.3,50.75 62,50.75 62,37.55 cw(c61,37.55) 61,36.55 39,36.55 cw(c39,37.55)
GND on Bottom Layer "GND_L06_P013" (solid, remove dead copper, pour order 13): 38,37.55 38,50.75 38.7,50.75 ccw(c38.7,51.75) 38.7,52.75 38,52.75 38,58.1 38.7,58.1 ccw(c38.7,58.9) 38.7,59.7 38,59.7 38,62.45 cw(c39,62.45) 39,63.45 61,63.45 cw(c61,62.45) 62,62.45 62,59.7 61.3,59.7 ccw(c61.3,58.9) 61.3,58.1 62,58.1 62,52.75 61.3,52.75 ccw(c61.3,51.75) 61.3,50.75 62,50.75 62,37.55 cw(c61,37.55) 61,36.55 39,36.55 cw(c39,37.55)

## Keep-outs
Keep-Out Layer:
  circle w2: c61.3,51.75 r1
  circle w2: c38.7,51.75 r1

## Silkscreen, mask and mechanical layers (free items; w line width, h text height)
M1 Board Outline:
  lines w0.2: 38,49.877 ccw(c38.7,51.75) 38,53.624 ; 46.25,36.55 53.75,36.55 ; 62,49.877 cw(c61.3,51.75) 62,53.624 ; 38,60 38,62.45 ; 38,60 38,62.45 ; 38,60 38.7,60 cw(c38.7,59.2) 38.7,58.4 38,58.4 38,52.75 38.7,52.75 cw(c38.7,51.75) 38.7,50.75 38,50.75 38,37.55 ccw(c39,37.55) 39,36.55 61,36.55 ccw(c61,37.55) 62,37.55 62,50.75 61.3,50.75 cw(c61.3,51.75) 61.3,52.75 62,52.75 62,58.4 61.3,58.4 cw(c61.3,59.2) 61.3,60 62,60 ; 38,62.45 cw(c39,62.45) 39,63.45 ; 38,62.45 cw(c39,62.45) 39,63.45 ; 39,63.45 61,63.45 ; 39,63.45 61,63.45 ; 61,63.45 cw(c61,62.45) 62,62.45 ; 61,63.45 cw(c61,62.45) 62,62.45 ; 62,60 62,62.45 ; 62,60 62,62.45